# Altium PCB Leningrad_modify.PcbDoc (part 1 of 4)
Units mil, origin at the board's own origin, x right, y up, seen from the top; angles counter-clockwise.
Board outline 10000 x 7310 mil, 2 copper layers (Top Layer, Bottom Layer); 250 components, 267 nets, 1381 pads, 472 vias.
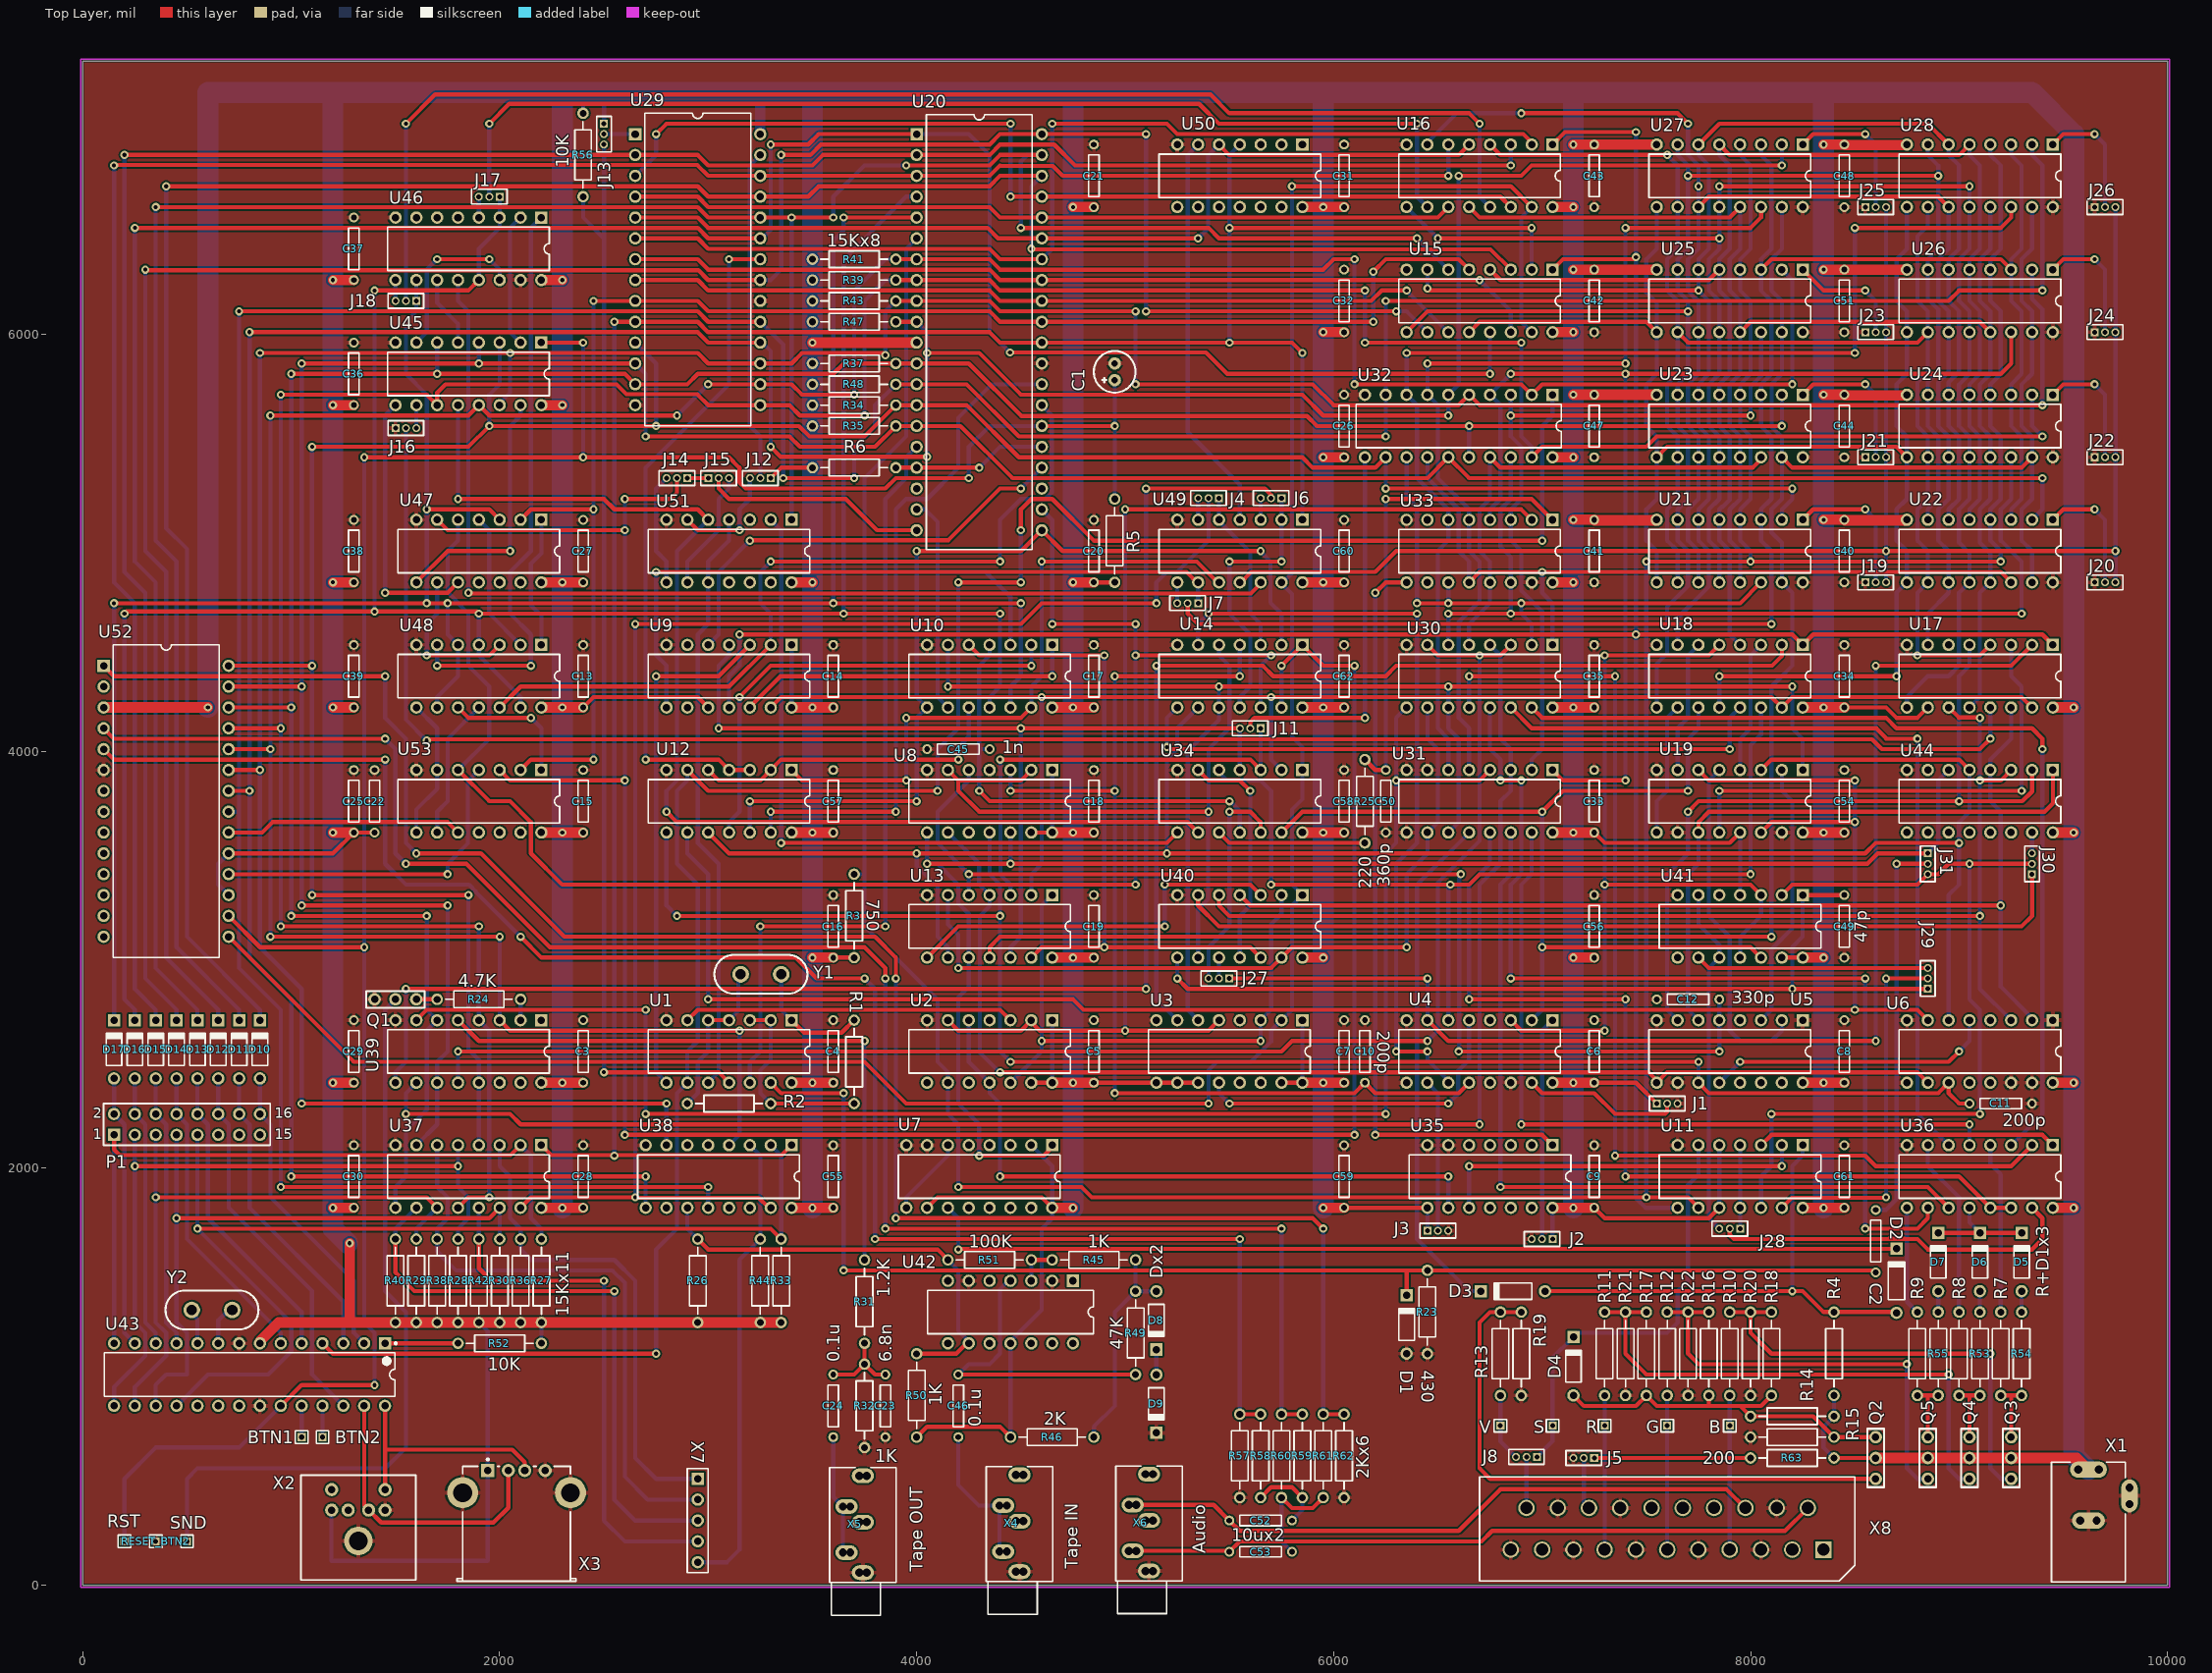
[diagram p0: Top Layer view]
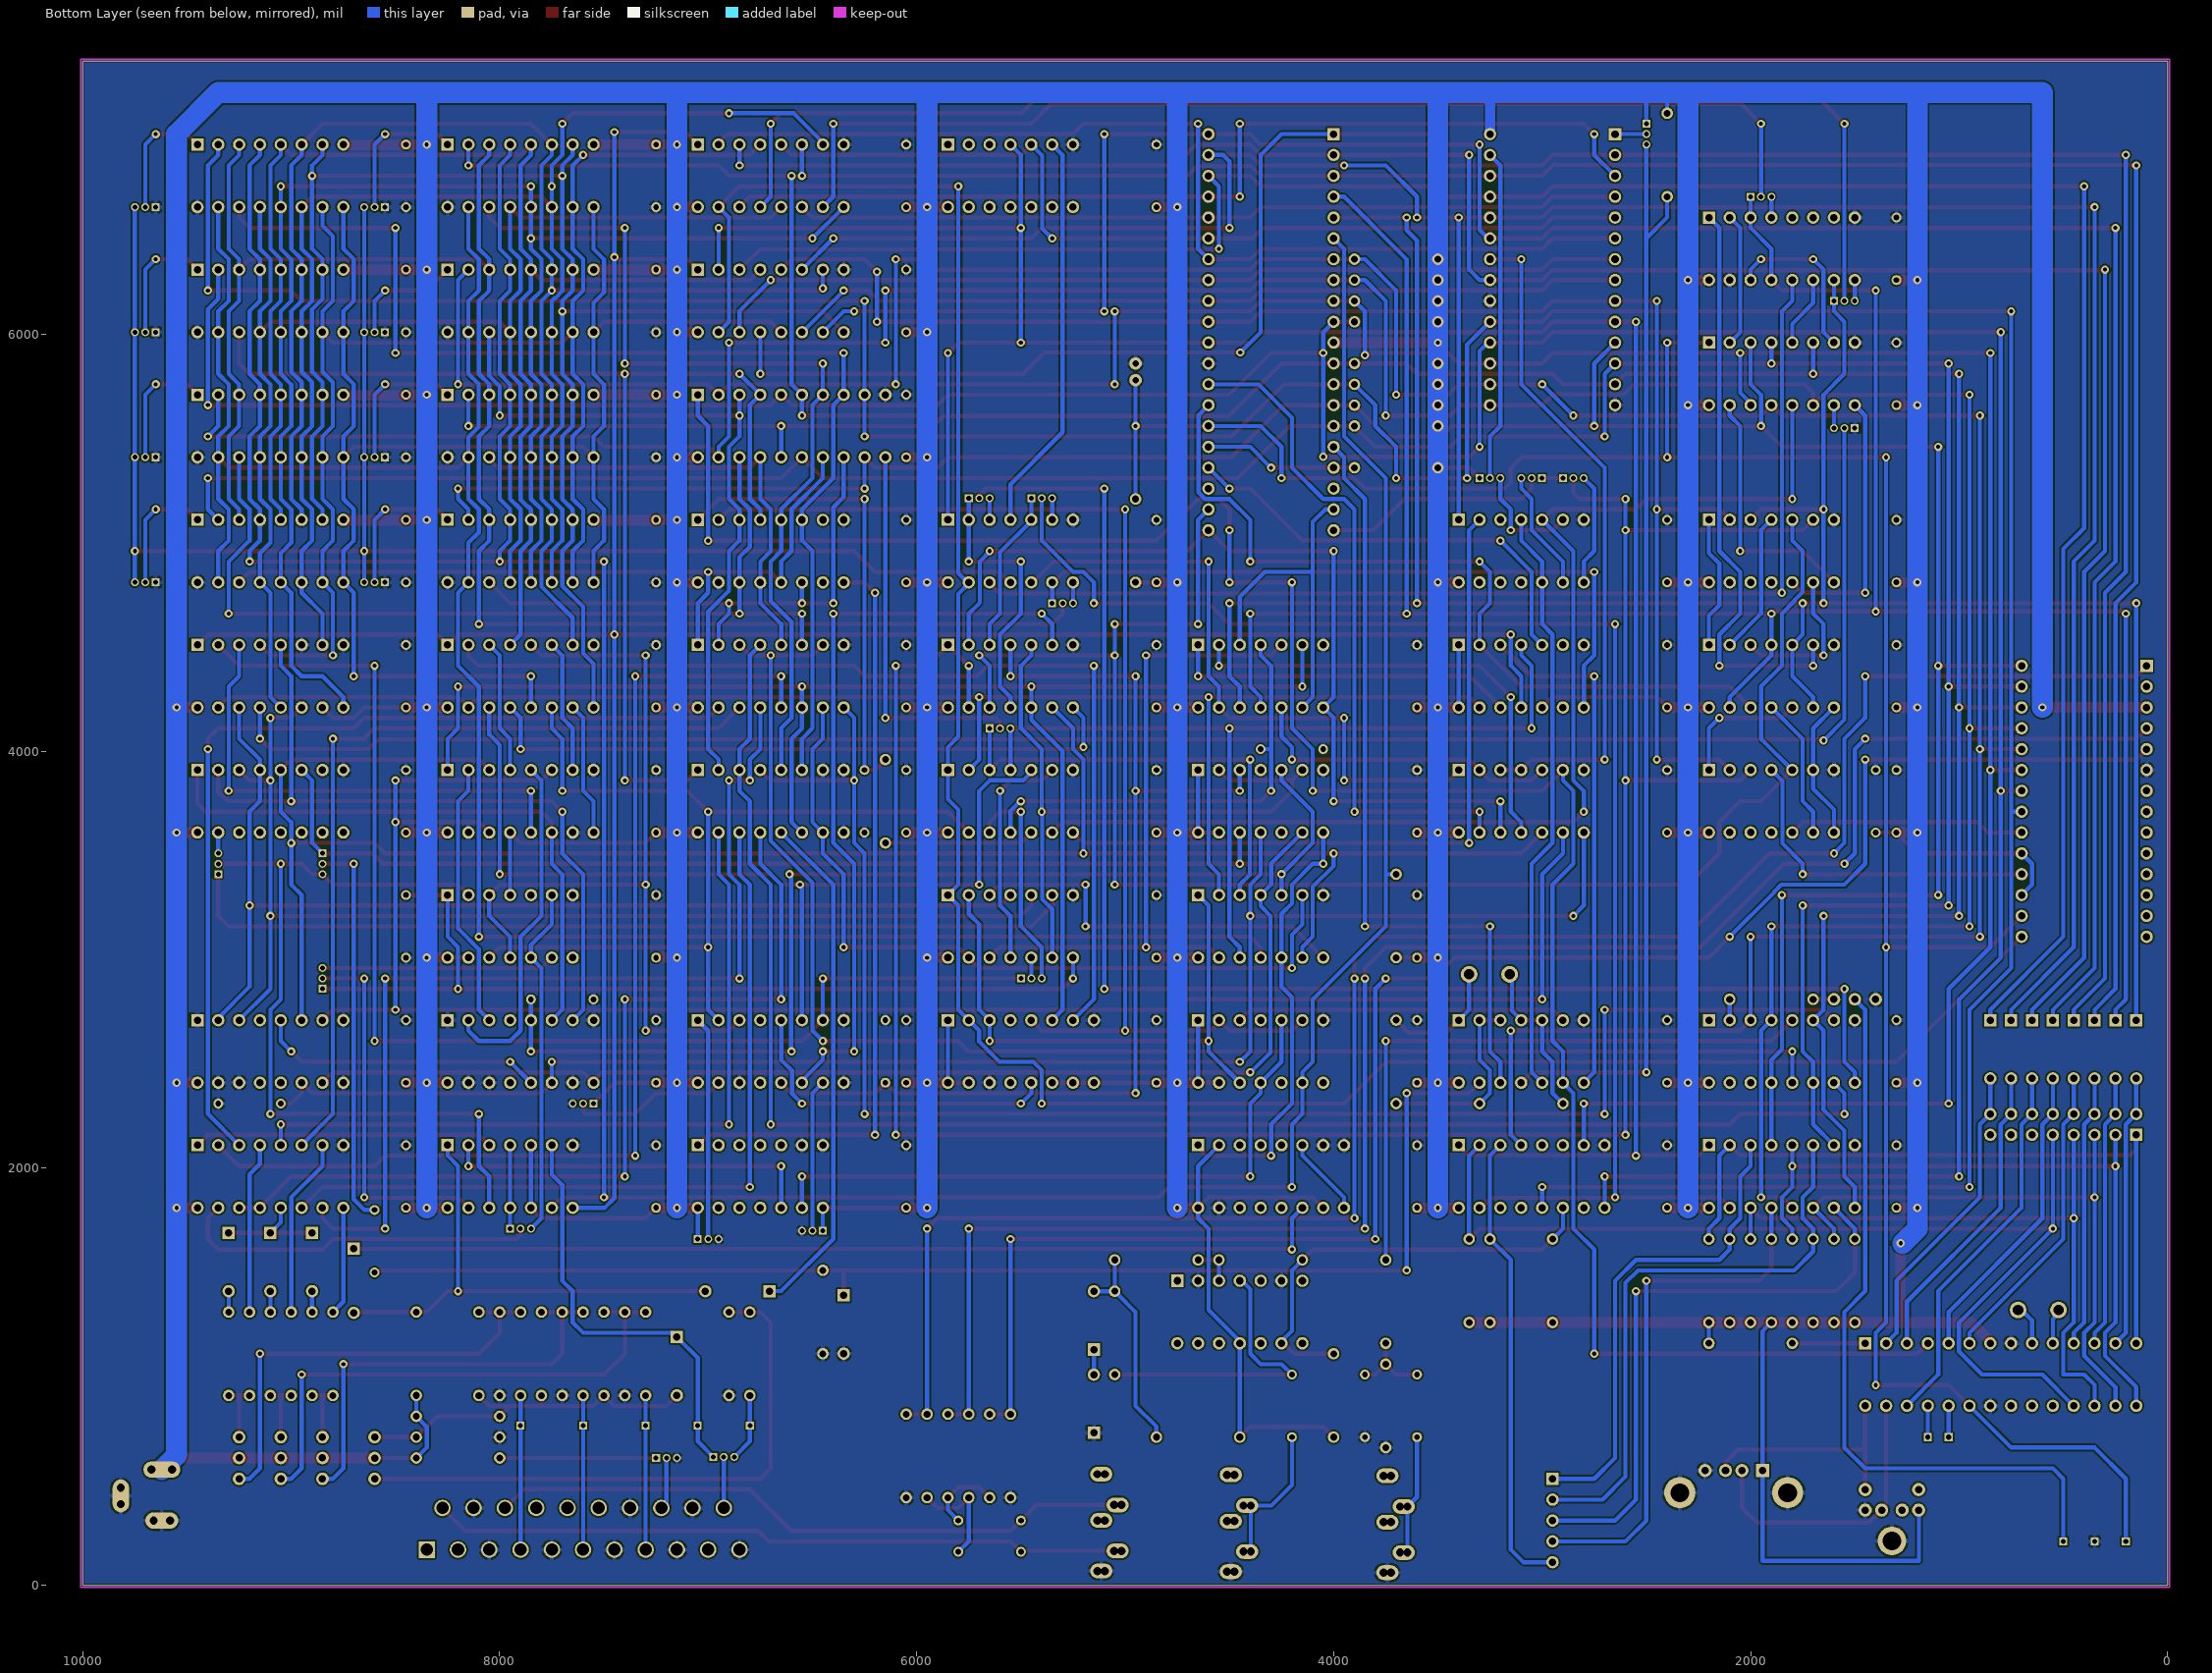
[diagram p1: Bottom Layer view, seen from below]

## Layer stack, top to bottom
Top Solder: solder mask 0.4, Solder Resist, Dk 3.5
Top Layer: signal copper 1.4
Dielectric 1: dielectric 12.6, FR-4, Dk 4.8
Bottom Layer: signal copper 1.4
Bottom Solder: solder mask 0.4, Solder Resist, Dk 3.5

## Board outline
0,0 10000,0 10000,7310 0,7310

## Design rules (kind name [scope] priority, off if disabled: settings)
BoardOutlineClearance [All] p1: gap=7.87 ignorepadtopadclearanceinfootprint=FALSE except(15.75: Arc-SplitBarrior Arc-SplitContinuation Track-SplitBarrior Track-SplitContinuation SMDPad-SplitBarrior SMDPad-SplitContinuation THPad-SplitBarrior THPad-SplitContinuation Via-SplitBarrior Via-SplitContinuation Fill-SplitBarrior Fill-SplitContinuation Poly-SplitBarrior Poly-SplitContinuation Region-SplitBarrior Region-SplitContinuation Text-SplitBarrior Text-SplitContinuation)
Clearance "Clearance Bottom Layer" [OnLayer('Bottom Layer')] p1: gap=8 ignorepadtopadclearanceinfootprint=TRUE except(10: Arc-Text Track-Text SMDPad-Text THPad-Text Via-Text Fill-Text Poly-Text Region-Text Text-Text)
Clearance "Clearance Top Layer" [OnLayer('Top Layer')] p2: gap=8 ignorepadtopadclearanceinfootprint=TRUE except(10: Arc-Text Track-Text SMDPad-Text THPad-Text Via-Text Fill-Text Poly-Text Region-Text Text-Text)
Clearance [All] p3: gap=7.87 ignorepadtopadclearanceinfootprint=FALSE except(3.5: Arc-Arc Arc-Track Arc-SMDPad Track-Track Track-SMDPad SMDPad-SMDPad; 5: Arc-Via Track-Via SMDPad-Via THPad-Via Via-Via; 10: Arc-Text Track-Text SMDPad-Text THPad-Text Via-Text Fill-Text Poly-Text Region-Text Text-Text)
HoleSize [All] p1: absolutevalues=TRUE maxlimit=248.03 minlimit=7.87 maxpercent=80.000 minpercent=20.000
MinimumAnnularRing [All] p1: minimumring=3
MinimumSolderMaskSliver [All] p1: minsoldermaskwidth=3.94
PolygonConnect PolygonConnect_1 [All] p1: thpad.connectstyle=Relief thpad.reliefconductorwidth=20 thpad.reliefentries=4 thpad.polygonreliefangle="90 Angle" thpad.airgapwidth=10 smdpad.connectstyle=Relief smdpad.reliefconductorwidth=20 smdpad.reliefentries=4 smdpad.polygonreliefangle="90 Angle" smdpad.airgapwidth=10 via.connectstyle=Direct via.reliefconductorwidth=20 via.reliefentries=4 via.polygonreliefangle="90 Angle" via.airgapwidth=10
RoomDefinition Mem [InComponentClass('Mem')] p1: confinementstyle=ConfineIn formatcopy=TRUE lockcomponents=FALSE outline 7205,4715 9805,4715 9805,6955 7205,6955
RoomDefinition Key [InComponentClass('Key')] p2: confinementstyle=ConfineIn formatcopy=TRUE lockcomponents=FALSE outline 89.21,816.47 89.21,1203.53 381.99,1203.53 381.99,1428 858.01,1428 858.01,1213.94 2241.56,1213.94 2241.56,1106.06 1521.02,1106.06 1521.02,816.47
RoutingCorners [All] p1: cornerstyle=Round minsetback=100 maxsetback=100
RoutingVias [All] p1: holewidth=19.68 width=39.37 viastyle="Through Hole" minholewidth=7.87 minwidth=17.72 maxholewidth=39.37 maxwidth=78.74
SilkToSilkClearance [All] p1: silktosilkclearance=3.94
SilkToSolderMaskClearance [IsPad] p1: minsilkscreentomaskgap=3.94 clearancetoexposedcopper=TRUE
SolderMaskExpansion [All] p1: expansion=4
Width [All] p1: maxlimit=100 minlimit=3.5 preferedwidth=15
25 further rules are at their usual default settings.

## Classes and differential pairs
component class Audio: C22 C25 C52 C53 R57 R58 R59 R60 R61 R62 U52 U53
component class CG: C3 C4 C5 C6 C7 C8 C9 C10 C11 C12 J1 J2 J3 R1 R2 R3 U1 U2 U3 U4 U5 U6 Y1
component class Con: B BTN1 BTN2 D10 D11 D12 D13 D14 D15 D16 D17 G J5 J8 P1 R R63 RESET_BTN2 RST S SND V X1 X2 X3 X4 X5 X6 X7 X8
component class CR: C1 C26 C27 J11 J12 J13 J14 J15 R5 R6 R34 R35 R37 R39 R41 R43 R47 R48 R56 U20 U29 U32 U51
component class CS: C13 C14 C15 C16 C17 C18 C19 C20 C21 C45 J4 J6 J7 U9 U10 U12 U13 U14 U34 U40 U49 U50
component class In: C23 C24 C28 C29 C30 C46 D8 D9 Q1 R24 R26 R27 R28 R29 R30 R31 R32 R33 R36 R38 R40 R42 R44 R45 R46 R49 R50 R51 U37 U38 U39 U42
component class Key: R52 U43 Y2
component class MC: C31 C32 C33 C34 C35 C36 C37 C38 C39 J16 J17 J18 U15 U16 U17 U18 U19 U45 U46 U47 U48
component class Mem: C40 C41 C42 C43 C44 C47 C48 C51 J19 J20 J21 J22 J23 J24 J25 J26 U21 U22 U23 U24 U25 U26 U27 U28
component class VC: C2 C49 C54 C55 C56 C57 D1 J27 J28 J29 J30 J31 R23 U7 U8 U41 U44
component class VS: C50 C58 C59 C60 C61 C62 D2 D3 D4 D5 D6 D7 Q2 Q3 Q4 Q5 R4 R7 R8 R9 R10 R11 R12 R13 R14 R15 R16 R17 R18 R19 R20 R21 R22 R25 R53 R54 R55 U11 U30 U31 U33 U35 U36

## Components (designator, comment, footprint, x,y, rotation, side; value= is the part's Value field where it differs from the comment)
B "" PIN1 7900,765 r90 top
BTN1 "Socket" PIN1 1050,710 r90 top
BTN2 "Socket" PIN1 1150,710 r90 top
C1 "Cap Pol1" JRB-5D 4950,5820 r90 top value=10uF
C2 "Cap" RAD-0.3 8600,1650 r270 top value=33nF
C3 "Cap" RAD-0.3 2400,2560 r270 top value=0.1uF
C4 "Cap" RAD-0.3 3600,2560 r270 top value=0.1uF
C5 "Cap" RAD-0.3 4850,2560 r270 top value=0.1uF
C6 "Cap" RAD-0.3 7250,2560 r270 top value=0.1uF
C7 "Cap" RAD-0.3 6050,2560 r270 top value=0.1uF
C8 "Cap" RAD-0.3 8450,2560 r270 top value=0.1uF
C9 "Cap" RAD-0.3 7250,1960 r270 top value=0.1uF
C10 "200p" RAD-0.3 6150,2560 r270 top value=200pF
C11 "200p" RAD-0.3 9200,2310 r0 top value=200pF
C12 "330p" RAD-0.3 7700,2810 r0 top value=330pF
C13 "Cap" RAD-0.3 2400,4360 r270 top value=0.1uF
C14 "Cap" RAD-0.3 3600,4360 r270 top value=0.1uF
C15 "Cap" RAD-0.3 2400,3760 r270 top value=0.1uF
C16 "Cap" RAD-0.3 3600,3160 r270 top value=0.1uF
C17 "Cap" RAD-0.3 4850,4360 r270 top value=0.1uF
C18 "Cap" RAD-0.3 4850,3760 r270 top value=0.1uF
C19 "Cap" RAD-0.3 4850,3160 r270 top value=0.1uF
C20 "Cap" RAD-0.3 4850,4960 r270 top value=0.1uF
C21 "Cap" RAD-0.3 4850,6760 r270 top value=0.1uF
C22 "Cap" RAD-0.3 1400,3760 r90 top value=0.1uF
C23 "6.8n" RAD-0.3 3850,860 r90 top value=6.8nF
C24 "0.1u" RAD-0.3 3600,860 r90 top value=0.1uF
C25 "Cap" RAD-0.3 1300,3760 r90 top value=0.1uF
C26 "Cap" RAD-0.3 6050,5560 r90 top value=0.1uF
C27 "Cap" RAD-0.3 2400,4960 r90 top value=0.1uF
C28 "Cap" RAD-0.3 2400,1960 r270 top value=0.1uF
C29 "Cap" RAD-0.3 1300,2560 r270 top value=0.1uF
C30 "Cap" RAD-0.3 1300,1960 r270 top value=0.1uF
C31 "Cap" RAD-0.3 6050,6760 r270 top value=0.1uF
C32 "Cap" RAD-0.3 6050,6160 r270 top value=0.1uF
C33 "Cap" RAD-0.3 7250,3760 r270 top value=0.1uF
C34 "Cap" RAD-0.3 8450,4360 r270 top value=0.1uF
C35 "Cap" RAD-0.3 7250,4360 r270 top value=0.1uF
C36 "Cap" RAD-0.3 1300,5810 r270 top value=0.1uF
C37 "Cap" RAD-0.3 1300,6410 r270 top value=0.1uF
C38 "Cap" RAD-0.3 1300,4960 r270 top value=0.1uF
C39 "Cap" RAD-0.3 1300,4360 r270 top value=0.1uF
C40 "Cap" RAD-0.3 8450,4960 r90 top value=0.1uF
C41 "Cap" RAD-0.3 7250,4960 r90 top value=0.1uF
C42 "Cap" RAD-0.3 7250,6160 r90 top value=0.1uF
C43 "Cap" RAD-0.3 7250,6760 r90 top value=0.1uF
C44 "Cap" RAD-0.3 8450,5560 r90 top value=0.1uF
C45 "1n" RAD-0.3 4200,4010 r0 top value=1000pF
C46 "0.1u" RAD-0.3 4200,860 r90 top value=0.1uF
C47 "Cap" RAD-0.3 7250,5560 r90 top value=0.1uF
C48 "Cap" RAD-0.3 8450,6760 r90 top value=0.1uF
C49 "47p" RAD-0.3 8450,3160 r90 top value=47pF
C50 "360p" RAD-0.3 6250,3760 r270 top value=360pF
C51 "Cap" RAD-0.3 8450,6160 r90 top value=0.1uF
C52 "Cap" RAD-0.3 5650,310 r180 top value=10uF
C53 "10ux2" RAD-0.3 5650,160 r180 top value=10uF
C54 "Cap" RAD-0.3 8450,3760 r270 top value=0.1uF
C55 "Cap" RAD-0.3 3600,1960 r270 top value=0.1uF
C56 "Cap" RAD-0.3 7250,3160 r270 top value=0.1uF
C57 "Cap" RAD-0.3 3600,3760 r270 top value=0.1uF
C58 "Cap" RAD-0.3 6050,3760 r270 top value=0.1uF
C59 "Cap" RAD-0.3 6050,1960 r270 top value=0.1uF
C60 "Cap" RAD-0.3 6050,4960 r270 top value=0.1uF
C61 "Cap" RAD-0.3 8450,1960 r270 top value=0.1uF
C62 "Cap" RAD-0.3 6050,4360 r270 top value=0.1uF
D1 "Diode 1N4148" DO-35 6350,1250.24 r90 top
D2 "" DO-35A 8700,1460 r90 top
D3 "" DO-35A 6860,1410 r180 top
D4 "Diode 1N4148" DO-35 7150,1050 r90 top
D5 "Diode 1N4148" DO-35 9300,1550 r90 top
D6 "Diode 1N4148" DO-35 9100,1550 r90 top
D7 "R+D1x3" DO-35 8900,1550 r90 top
D8 "Diode 1N4148" DO-35 5150,1270 r270 top
D9 "Dx2" DO-35 5150,870 r270 top
D10 "Diode 1N4148" DO-35 850,2570 r90 top
D11 "Diode 1N4148" DO-35 750,2570 r90 top
D12 "Diode 1N4148" DO-35 650,2570 r90 top
D13 "Diode 1N4148" DO-35 550,2570 r90 top
D14 "Diode 1N4148" DO-35 450,2570 r90 top
D15 "Diode 1N4148" DO-35 350,2570 r90 top
D16 "Diode 1N4148" DO-35 250,2570 r90 top
D17 "Diode 1N4148" DO-35 150,2570 r90 top
G "" PIN1 7600,765 r90 top
J1 "Jump3" MHDR1X3 7550,2310 r0 top
J2 "Jump3" MHDR1X3 7050,1660 r180 top
J3 "Jump3" MHDR1X3 6450,1700 r0 top
J4 "Jump3" MHDR1X3 5450,5214.09 r180 top
J5 "Jump3" MHDR1X3 7250,610 r180 top
J6 "Jump3" MHDR1X3 5750,5214.09 r180 top
J7 "Jump3" MHDR1X3 5350,4710 r180 top
J8 "Jump3" MHDR1X3 6975,615 r180 top
J11 "Jump3" MHDR1X3 5650,4110 r180 top
J12 "Jump3" MHDR1X3 3300,5310 r180 top
J13 "Jump3" MHDR1X3 2500,7010 r270 top
J14 "Jump3" MHDR1X3 2900,5310 r180 top
J15 "Jump3" MHDR1X3 3000,5310 r0 top
J16 "Jump3" MHDR1X3 1500,5550 r0 top
J17 "Jump3" MHDR1X3 2000,6660 r180 top
J18 "Jump3" MHDR1X3 1600,6160 r180 top
J19 "Jump3" MHDR1X3 8550,4810 r0 top
J20 "Jump3" MHDR1X3 9650,4810 r0 top
J21 "Jump3" MHDR1X3 8550,5410 r0 top
J22 "Jump3" MHDR1X3 9650,5410 r0 top
J23 "Jump3" MHDR1X3 8550,6010 r0 top
J24 "Jump3" MHDR1X3 9650,6010 r0 top
J25 "Jump3" MHDR1X3 8550,6610 r0 top
J26 "Jump3" MHDR1X3 9650,6610 r0 top
J27 "Jump3" MHDR1X3 5500,2910 r180 top
J28 "Jump3" MHDR1X3 7950,1710 r180 top
J29 "Jump3" MHDR1X3 8850,2860 r90 top
J30 "Jump3" MHDR1X3 9350,3410 r90 top
J31 "Jump3" MHDR1X3 8850,3510 r270 top
P1 "Header 8X2" HDR2X8 150,2160 r0 top
Q1 "KT315" D35 1500,2810 r0 top
Q2 "KT315" D35 8600,609.76 r90 top
Q3 "KT315" D35 9250,610 r90 top
Q4 "KT315" D35 9050,610 r90 top
Q5 "KT315" D35 8850,610 r90 top
R "" PIN1 7300,765 r90 top
R1 "" AXIAL-0.4 3700,2510 r270 top value=470
R2 "" AXIAL-0.4 3100,2310 r180 top value=470
R3 "750" AXIAL-0.4 3700,3210 r270 top
R4 "" AXIAL-0.4 8400,1110 r90 top value=10K
R5 "" AXIAL-0.4 4950,5010 r90 top value=10K
R6 "" AXIAL-0.4 3700,5360 r180 top value=10K
R7 "" AXIAL-0.4 9200,1109.76 r270 top value=680
R8 "" AXIAL-0.4 9000,1109.76 r270 top value=680
R9 "" AXIAL-0.4 8800,1109.76 r270 top value=680
R10 "" AXIAL-0.4 7900,1109.76 r270 top value=75
R11 "" AXIAL-0.4 7300,1109.76 r270 top value=75
R12 "" AXIAL-0.4 7600,1109.76 r270 top value=75
R13 "" AXIAL-0.4 6800,1109.76 r270 top value=75
R14 "" AXIAL-0.4 8200,809.76 r0 top value=750
R15 "" AXIAL-0.4 8200,709.76 r0 top value=1K
R16 "" AXIAL-0.4 7800,1109.76 r270 top value=470
R17 "" AXIAL-0.4 7500,1109.76 r270 top value=1K
R18 "" AXIAL-0.4 8100,1109.76 r270 top value=2K
R19 "" AXIAL-0.4 6900,1109.76 r90 top value=200
R20 "" AXIAL-0.4 8000,1109.76 r90 top value=200
R21 "" AXIAL-0.4 7400,1109.76 r90 top value=200
R22 "" AXIAL-0.4 7700,1109.76 r90 top value=200
R23 "430" AXIAL-0.4 6450,1310 r90 top
R24 "4.7K" AXIAL-0.4 1900,2810 r180 top
R25 "220" AXIAL-0.4 6150,3760 r270 top
R26 "15Kx11" AXIAL-0.4 2950,1460 r270 top value=15K
R27 "Res2" AXIAL-0.4 2200,1460 r270 top value=15K
R28 "Res2" AXIAL-0.4 1800,1460 r270 top value=15K
R29 "Res2" AXIAL-0.4 1600,1460 r270 top value=15K
R30 "Res2" AXIAL-0.4 2000,1460 r270 top value=15K
R31 "1.2K" AXIAL-0.4 3750,1360 r270 top
R32 "1K" AXIAL-0.4 3750,860 r90 top
R33 "Res2" AXIAL-0.4 3350,1460 r270 top value=15K
R34 "" AXIAL-0.4 3700,5660 r180 top value=15K
R35 "15Kx8" AXIAL-0.4 3700,5560 r180 top value=15K
R36 "Res2" AXIAL-0.4 2100,1460 r270 top value=15K
R37 "" AXIAL-0.4 3700,5860 r180 top value=15K
R38 "Res2" AXIAL-0.4 1700,1460 r270 top value=15K
R39 "" AXIAL-0.4 3700,6260 r180 top value=15K
R40 "Res2" AXIAL-0.4 1500,1460 r270 top value=15K
R41 "" AXIAL-0.4 3700,6360 r180 top value=15K
R42 "Res2" AXIAL-0.4 1900,1460 r270 top value=15K
R43 "" AXIAL-0.4 3700,6160 r180 top value=15K
R44 "Res2" AXIAL-0.4 3250,1460 r270 top value=15K
R45 "1K" AXIAL-0.4 4850,1560 r0 top
R46 "2K" AXIAL-0.4 4650,710 r180 top
R47 "" AXIAL-0.4 3700,6060 r180 top value=15K
R48 "" AXIAL-0.4 3700,5760 r180 top value=15K
R49 "47K" AXIAL-0.4 5050,1210 r90 top
R50 "1K" AXIAL-0.4 4000,910 r270 top
R51 "100K" AXIAL-0.4 4350,1560 r0 top
R52 "10K" AXIAL-0.4 2000,1160 r0 top
R53 "Res2" AXIAL-0.4 9100,1109.76 r270 top value=680
R54 "Res2" AXIAL-0.4 9300,1109.76 r270 top value=680
R55 "Res2" AXIAL-0.4 8900,1109.76 r270 top value=680
R56 "10K" AXIAL-0.4 2400,6860 r270 top
R57 "Res2" AXIAL-0.4 5550,620 r270 top value=2K
R58 "Res2" AXIAL-0.4 5650,620 r270 top value=2K
R59 "Res2" AXIAL-0.4 5850,620 r270 top value=2K
R60 "Res2" AXIAL-0.4 5750,620 r90 top value=2K
R61 "Res2" AXIAL-0.4 5950,620 r270 top value=2K
R62 "2Kx6" AXIAL-0.4 6050,620 r90 top value=2K
R63 "200" AXIAL-0.4 8200,610 r180 top
RESET_BTN2 "" PIN1 350,210 r90 top
RST "" PIN1 200,210 r90 top
S "" PIN1 7050,765 r90 top (schematic designator SYNC)
SND "" PIN1 500,210 r90 top
U1 "" N014 3100,2560 r180 top
U2 "" N014 4350,2560 r180 top
U3 "" N016 5500,2560 r180 top
U4 "" N016 6700,2560 r180 top
U5 "" N016 7900,2560 r180 top
U6 "" N016 9100,2560 r180 top
U7 "" 648-08 4300,1960 r180 top
U8 "" N014 4350,3760 r180 top
U9 "" N014 3100,4360 r180 top
U10 "" N014 4350,4360 r180 top
U11 "" N014 7950,1960 r180 top
U12 "" N014 3100,3760 r180 top
U13 "" N014 4350,3160 r180 top
U14 "" N014 5550,4360 r180 top
U15 "" N016 6700,6160 r180 top
U16 "" N016 6700,6760 r180 top
U17 "" N016 9100,4360 r180 top
U18 "" N016 7900,4360 r180 top
U19 "" N016 7900,3760 r180 top
U20 "Z84C0004PEC" PDIP40 4300,6010 r270 top
U21 "MN41256A-08" DIP16 8248.81,5110 r270 top
U22 "MN41256A-08" DIP16 9448.81,5110 r270 top
U23 "MN41256A-08" DIP16 8248.81,5710 r270 top
U24 "MN41256A-08" DIP16 9448.81,5710 r270 top
U25 "MN41256A-08" DIP16 8248.81,6310 r270 top
U26 "MN41256A-08" DIP16 9448.81,6310 r270 top
U27 "MN41256A-08" DIP16 8248.81,6910 r270 top
U28 "MN41256A-08" DIP16 9448.81,6910 r270 top
U29 "M27C512-10B1" PDIP28 2950,6310 r270 top
U30 "" N016D 6700,4360 r180 top
U31 "" N016D 6700,3760 r180 top
U32 "" N020 6600,5560 r180 top
U33 "" N016 6700,4959.76 r180 top
U34 "" N014 5550,3760 r180 top
U35 "" N014 6750,1960 r180 top
U36 "" N016 9100,1960 r180 top
U37 "" N016 1850,1960 r180 top
U38 "" N016 3050,1960 r180 top
U39 "" N016 1850,2560 r180 top
U40 "" N014 5550,3160 r180 top
U41 "SN74HC74N" N014 7950,3160 r180 top
U42 "LM111J" J014 4450,1310 r180 top
U43 "ATmega168A-PU" 28P3 800,1010 r270 top
U44 "" N016 9100,3760 r180 top
U45 "SN74HC174N" N016 1850,5810 r180 top
U46 "SN74HC257N" N016 1850,6410 r180 top
U47 "SN74HC02N" N014 1900,4960 r180 top
U48 "SN74HC00N" N014 1900,4360 r180 top
U49 "SN74HC32N" N014 5550,4960 r180 top
U50 "SN74HC08N" N014 5550,6760 r180 top
U51 "SN74HC32N" N014 3100,4960 r180 top
U52 "AY-3-8912" FDIP28W 400,3760 r270 top
U53 "SN74HC02N" N014 1900,3760 r180 top
V "" PIN1 6800,765 r90 top (schematic designator VIDEO)
X1 "PWR2.5" KLD-0202 9620.63,14.72 r90 top
X2 "PS2-6PIN" PS2-6PIN 1322.05,25.35 r180 top
X3 "787761-1" 787761 2080.63,18.9 r270 top
X4 "Tape IN" ST-3150-5N 4460,-140 r180 top
X5 "Tape OUT" ST-3150-5N 3708.82,-144.72 r180 top
X6 "Audio" ST-3150-5N 5081.18,-136.85 r180 top
X7 "Header 5" HDR1X5 2950,510 r270 top
X8 "SCART" SCART 8350,170 r180 top
Y1 "XTAL" HC25U 3253,2930 r180 top
Y2 "24 MHz" HC25U 620,1320 r180 top

## Footprints (in the part's own frame and the unit in brackets; to place one, negate y for a bottom-side part, rotate by r counter-clockwise, add the part's x,y. Pads: shape width x height; smd on the part's side, far side on the other; paste and mask are expansions set on the pad)
28P3 [mm] "DIP, 28-Leads, Row Spacing 7.62mm, Pitch 2.54mm, Body 34.67x7.3mm"
  rect 1.5x1.5 hole 0.9: 1(-3.81,16.51)
  round 1.5 hole 0.9: 2(-3.81,13.97) 3(-3.81,11.43) 4(-3.81,8.89) 5(-3.81,6.35) 6(-3.81,3.81) 7(-3.81,1.27) 8(-3.81,-1.27) 9(-3.81,-3.81) 10(-3.81,-6.35) 11(-3.81,-8.89) 12(-3.81,-11.43) 13(-3.81,-13.97) 14(-3.81,-16.51) 15(3.81,-16.51) 16(3.81,-13.97) 17(3.81,-11.43) 18(3.81,-8.89) 19(3.81,-6.35) 20(3.81,-3.81) 21(3.81,-1.27) 22(3.81,1.27) 23(3.81,3.81) 24(3.81,6.35) 25(3.81,8.89) 26(3.81,11.43) 27(3.81,13.97) 28(3.81,16.51)
  silkscreen extent -3.93,-17.7 2.65,17.94, body extent -3.6,-17.65 3.6,17.65, height 4.58
648-08 [mm] "DIP; 16 Leads; Row Spacing 7.62 mm; Pitch 2.54 mm"
  rect 1.5x1.5 hole 0.9: 1(-8.89,-3.81)
  round 1.5 hole 0.9: 2(-6.35,-3.81) 3(-3.81,-3.81) 4(-1.27,-3.81) 5(1.27,-3.81) 6(3.81,-3.81) 7(6.35,-3.81) 8(8.89,-3.81) 9(8.89,3.81) 10(6.35,3.81) 11(3.81,3.81) 12(1.27,3.81) 13(-1.27,3.81) 14(-3.81,3.81) 15(-6.35,3.81) 16(-8.89,3.81)
  silkscreen extent -9.85,-2.65 9.85,2.65
787761 [mm] "Connector; USB1.1, Type A, Thru-Hole; 4 Position; Right Angle"
  rect 1.6x1.6 hole 0.92: 1(-13.49,-3.5)
  round 1.6 hole 0.92: 2(-13.49,-1) 3(-13.49,1) 4(-13.49,3.5)
  round 3.8 hole 2.3: 5(-10.78,6.57) 6(-10.78,-6.57)
  silkscreen extent -14.96,-7.25 0,7.25
AXIAL-0.4 [mm] "Axial Device, Thru-Hole; 2 Leads; 0.4 in Pin Spacing"
  round 1.4 hole 0.85: 1(-5.08,0) 2(5.08,0)
  silkscreen extent -4.06,-1.02 4.06,1.02
D35 [mil]
  round 60 hole 35.43: 1(-100,0) 2(0,0) 3(100,0)
  silkscreen extent -140,-40 140,40
DIP16 [mm]
  rect 1.5x1.5 hole 0.9: 1(0,0.03)
  round 1.5 hole 0.9: 2(0,-2.51) 3(0,-5.05) 4(0,-7.59) 5(0,-10.13) 6(0,-12.67) 7(0,-15.21) 8(0,-17.75) 9(7.62,-17.75) 10(7.62,-15.21) 11(7.62,-12.67) 12(7.62,-10.13) 13(7.62,-7.59) 14(7.62,-5.05) 15(7.62,-2.51) 16(7.62,0.03)
  silkscreen extent 1.16,-18.71 6.46,0.99
DO-35 [mm] "Diode, Axial; Body 3.8 x 1.9 mm (LxDia. max), Lead Dia. 0.53 mm (max)"
  round 1.5 hole 0.9: 1(-3.55,0)
  rect 1.5x1.5 hole 0.9: 2(3.55,0)
  silkscreen extent -1.95,-0.95 2.05,0.95
DO-35A [mm] "Diode, Axial; Body 4.6 x 1.9 mm (LxDia. max), Lead Dia. 0.53 mm (max)"
  round 1.5 hole 0.9: 1(-3.9,0)
  rect 1.5x1.5 hole 0.9: 2(3.9,0)
  silkscreen extent -2.3,-1 2.4,1
FDIP28W [mm] "Ceramic Frit-seal DIP, Window; 28 Leads; Row Spacing 15.24 mm; Pitch 2.54 mm"
  rect 1.5x1.5 hole 0.9: 1(-16.51,-7.62)
  round 1.5 hole 0.9: 2(-13.97,-7.62) 3(-11.43,-7.62) 4(-8.89,-7.62) 5(-6.35,-7.62) 6(-3.81,-7.62) 7(-1.27,-7.62) 8(1.27,-7.62) 9(3.81,-7.62) 10(6.35,-7.62) 11(8.89,-7.62) 12(11.43,-7.62) 13(13.97,-7.62) 14(16.51,-7.62) 15(16.51,7.62) 16(13.97,7.62) 17(11.43,7.62) 18(8.89,7.62) 19(6.35,7.62) 20(3.81,7.62) 21(1.27,7.62) 22(-1.27,7.62) 23(-3.81,7.62) 24(-6.35,7.62) 25(-8.89,7.62) 26(-11.43,7.62) 27(-13.97,7.62) 28(-16.51,7.62)
  silkscreen extent -19.05,-6.45 19.05,6.45
HC25U [mil]
  round 80 hole 50: 1(-97,0) 2(97,0)
  silkscreen extent -223,-93 223,93
HDR1X5 [mm] "Connector; Header; 5 Position"
  rect 1.5x1.5 hole 0.9: 1(0,0)
  round 1.5 hole 0.9: 2(2.54,0) 3(5.08,0) 4(7.62,0) 5(10.16,0)
  silkscreen extent -1.27,-1.27 11.43,1.27
HDR2X8 [mm] "Connector; Header; 8x2 Position"
  rect 1.5x1.5 hole 0.9: 1(0,0)
  round 1.5 hole 0.9: 2(0,2.54) 3(2.54,0) 4(2.54,2.54) 5(5.08,0) 6(5.08,2.54) 7(7.62,0) 8(7.62,2.54) 9(10.16,0) 10(10.16,2.54) 11(12.7,0) 12(12.7,2.54) 13(15.24,0) 14(15.24,2.54) 15(17.78,0) 16(17.78,2.54)
  silkscreen extent -1.27,-1.27 19.05,3.81
J014 [mm] "DIP; 14 Leads; Row Spacing 7.62 mm; Pitch 2.54 mm"
  rect 1.5x1.5 hole 0.9: 1(-7.62,-3.81)
  round 1.5 hole 0.9: 2(-5.08,-3.81) 3(-2.54,-3.81) 4(0,-3.81) 5(2.54,-3.81) 6(5.08,-3.81) 7(7.62,-3.81) 8(7.62,3.81) 9(5.08,3.81) 10(2.54,3.81) 11(0,3.81) 12(-2.54,3.81) 13(-5.08,3.81) 14(-7.62,3.81)
  silkscreen extent -10.1,-2.65 10.1,2.65, body extent -9.97,-3.93 9.97,3.93, height 5.08
JRB-5D [mil]
  round 60 hole 30: 1(-40,0) 2(40,0)
  silkscreen extent -100,-100 100,100
KLD-0202 [mm] "DC Power Jack, 2.5mm, KLD Series, PCB Mount"
  oval 2x4.5 all layers, no hole: 1(13.7,0)
  round 1.5 hole 1: 1A(13.7,-1.25) 1B(13.7,1.25) 2A(7.5,-1) 2B(7.5,1) 3A(9.5,-5) 3B(11.5,-5)
  oval 2x4 all layers, no hole: 2(7.5,0)
  oval 4x2 all layers, no hole: 3(10.5,-5)
  silkscreen extent 0,-4.5 14.6,4.5
MHDR1X3 [mil] "Connector; Header; 3 Position"
  rect 38x38 hole 23.62: 1(0,0)
  round 38 hole 23.62: 2(50,0) 3(100,0)
  silkscreen extent -35,-35 135,35
N014 [mm] "DIP; 14 Leads; Row Spacing 7.62 mm; Pitch 2.54 mm"
  rect 1.5x1.5 hole 0.9: 1(-7.62,-3.81)
  round 1.5 hole 0.9: 2(-5.08,-3.81) 3(-2.54,-3.81) 4(0,-3.81) 5(2.54,-3.81) 6(5.08,-3.81) 7(7.62,-3.81) 8(7.62,3.81) 9(5.08,3.81) 10(2.54,3.81) 11(0,3.81) 12(-2.54,3.81) 13(-5.08,3.81) 14(-7.62,3.81)
  silkscreen extent -9.85,-2.65 9.85,2.65
N016 [mm] "DIP; 16 Leads; Row Spacing 7.62 mm; Pitch 2.54 mm"
  rect 1.5x1.5 hole 0.9: 1(-8.89,-3.81)
  round 1.5 hole 0.9: 2(-6.35,-3.81) 3(-3.81,-3.81) 4(-1.27,-3.81) 5(1.27,-3.81) 6(3.81,-3.81) 7(6.35,-3.81) 8(8.89,-3.81) 9(8.89,3.81) 10(6.35,3.81) 11(3.81,3.81) 12(1.27,3.81) 13(-1.27,3.81) 14(-3.81,3.81) 15(-6.35,3.81) 16(-8.89,3.81)
  silkscreen extent -9.85,-2.65 9.85,2.65
N016D [mm] "DIP; 16 Leads; Row Spacing 7.62 mm; Pitch 2.54 mm"
  rect 1.5x1.5 hole 0.9: 1(-8.89,-3.81)
  round 1.5 hole 0.9: 2(-6.35,-3.81) 3(-3.81,-3.81) 4(-1.27,-3.81) 5(1.27,-3.81) 6(3.81,-3.81) 7(6.35,-3.81) 8(8.89,-3.81) 9(8.89,3.81) 10(6.35,3.81) 11(3.81,3.81) 12(1.27,3.81) 13(-1.27,3.81) 14(-3.81,3.81) 15(-6.35,3.81) 16(-8.89,3.81)
  silkscreen extent -9.85,-2.65 9.85,2.65
N020 [mm] "DIP; 20 Leads; Row Spacing 7.62 mm; Pitch 2.54 mm"
  rect 1.5x1.5 hole 0.9: 1(-11.43,-3.81)
  round 1.5 hole 0.9: 2(-8.89,-3.81) 3(-6.35,-3.81) 4(-3.81,-3.81) 5(-1.27,-3.81) 6(1.27,-3.81) 7(3.81,-3.81) 8(6.35,-3.81) 9(8.89,-3.81) 10(11.43,-3.81) 11(11.43,3.81) 12(8.89,3.81) 13(6.35,3.81) 14(3.81,3.81) 15(1.27,3.81) 16(-1.27,3.81) 17(-3.81,3.81) 18(-6.35,3.81) 19(-8.89,3.81) 20(-11.43,3.81)
  silkscreen extent -12.5,-2.65 12.5,2.65
PDIP28 [mm] "DIP; 28 Leads; Row Spacing 15.24 mm; Pitch 2.54 mm"
  rect 1.5x1.5 hole 0.9: 1(-16.51,-7.62)
  round 1.5 hole 0.9: 2(-13.97,-7.62) 3(-11.43,-7.62) 4(-8.89,-7.62) 5(-6.35,-7.62) 6(-3.81,-7.62) 7(-1.27,-7.62) 8(1.27,-7.62) 9(3.81,-7.62) 10(6.35,-7.62) 11(8.89,-7.62) 12(11.43,-7.62) 13(13.97,-7.62) 14(16.51,-7.62) 15(16.51,7.62) 16(13.97,7.62) 17(11.43,7.62) 18(8.89,7.62) 19(6.35,7.62) 20(3.81,7.62) 21(1.27,7.62) 22(-1.27,7.62) 23(-3.81,7.62) 24(-6.35,7.62) 25(-8.89,7.62) 26(-11.43,7.62) 27(-13.97,7.62) 28(-16.51,7.62)
  silkscreen extent -19.05,-6.45 19.05,6.45
PDIP40 [mm] "DIP; 40 Leads; Row Spacing 15.24 mm; Pitch 2.54 mm"
  rect 1.5x1.5 hole 0.9: 1(-24.13,-7.62)
  round 1.5 hole 0.9: 2(-21.59,-7.62) 3(-19.05,-7.62) 4(-16.51,-7.62) 5(-13.97,-7.62) 6(-11.43,-7.62) 7(-8.89,-7.62) 8(-6.35,-7.62) 9(-3.81,-7.62) 10(-1.27,-7.62) 11(1.27,-7.62) 12(3.81,-7.62) 13(6.35,-7.62) 14(8.89,-7.62) 15(11.43,-7.62) 16(13.97,-7.62) 17(16.51,-7.62) 18(19.05,-7.62) 19(21.59,-7.62) 20(24.13,-7.62) 21(24.13,7.62) 22(21.59,7.62) 23(19.05,7.62) 24(16.51,7.62) 25(13.97,7.62) 26(11.43,7.62) 27(8.89,7.62) 28(6.35,7.62) 29(3.81,7.62) 30(1.27,7.62) 31(-1.27,7.62) 32(-3.81,7.62) 33(-6.35,7.62) 34(-8.89,7.62) 35(-11.43,7.62) 36(-13.97,7.62) 37(-16.51,7.62) 38(-19.05,7.62) 39(-21.59,7.62) 40(-24.13,7.62)
  silkscreen extent -26.5,-6.45 26.5,6.45
PIN1 [mil] "Connector; Plug"
  rect 38x38 hole 23.62: 1(0,0)
  silkscreen extent -30,-30 30,30
PS2-6PIN [mm] "PS2 Socket, 6 Pin, Through Hole"
  round 1.6 hole 0.9: 1(-1.25,-8.5) 2(1.25,-8.5) 3(-3.25,-8.5) 4(3.25,-8.5) 5(-3.25,-11) 6(3.25,-11)
  round 3.5 hole 2.3: S(0,-4.75)
  silkscreen extent -7,-12.75 7,0
RAD-0.3 [mm] "Radial Cap, Thru-Hole; 2 Leads; 0.3 in Pin Spacing"
  round 1.2 hole 0.7: 1(-3.81,0) 2(3.81,0)
  silkscreen extent -2.54,-0.64 2.54,0.64
SCART [mm]
  rect 2x2 hole 1.5: 1(0,0)
  round 2 hole 1.5: 2(1.905,-5.08) 3(3.81,0) 4(5.715,-5.08) 5(7.62,0) 6(9.525,-5.08) 7(11.43,0) 8(13.335,-5.08) 9(15.24,0) 10(17.145,-5.08) 11(19.05,0) 12(20.955,-5.08) 13(22.86,0) 14(24.765,-5.08) 15(26.67,0) 16(28.575,-5.08) 17(30.48,0) 18(32.385,-5.08) 19(34.29,0) 20(36.195,-5.08) 21(38.1,0)
  silkscreen extent -3.81,-8.89 41.91,3.81
ST-3150-5N [mm] "Connector; Stereo Jack, 3.5mm, 5 Position"
  oval 2.7x1.8 all layers, no hole: 1(-0.85,-5.2) 2(1.15,-7.65) 3(-0.85,-11.35) 4(1.15,-13.25) 5(-0.85,-17)
  round 1.2 hole 1: 1A(-1.3,-5.2) 1B(-0.4,-5.2) 2A(0.7,-7.65) 2B(1.6,-7.65) 3A(-1.3,-11.35) 3B(-0.4,-11.35) 4A(0.7,-13.25) 4B(1.6,-13.25) 5A(-1.3,-17) 5B(-0.4,-17)
  silkscreen extent -4.9,-18 3.2,0

## Part data
B G R RESET_BTN2 RST S SND V: library part Socket, "Socket", LatestRevisionDate=17-Jul-2002, LatestRevisionNote="Re-released for DXP Platform.", Publisher="Altium Limited"
C1: "Polarized Capacitor (Radial)", LatestRevisionDate=17-Jul-2002, LatestRevisionNote="Re-released for DXP Platform.", PackageDescription="Polarized Capacitor (Radial); 2 Leads", PackageReference=RB7.6-15, Published=8-Jun-2000, Publisher="Altium Limited"
C2 C3 C4 C5 C6 C7 C8 C9 C13 C14 C15 C16 C17 C18 C19 C20 C21 C22 C25 C26 C27 C28 C29 C30 C31 C32 C33 C34 C35 C36 C37 C38 C39 C40 C41 C42 C43 C44 C47 C48 C51 C52 C54 C55 C56 C57 C58 C59 C60 C61 C62: "Capacitor", LatestRevisionDate=17-Jul-2002, LatestRevisionNote="Re-released for DXP Platform.", PackageDescription="Radial Cap, Thru-Hole; 2 Leads; 0.3 in Pin Spacing", PackageReference=RAD-0.3, Published=8-Jun-2000, Publisher="Altium Limited"
C10 C11 C12 C23 C24 C45 C46 C49 C50 C53: library part Cap, "Capacitor", LatestRevisionDate=17-Jul-2002, LatestRevisionNote="Re-released for DXP Platform.", PackageDescription="Radial Cap, Thru-Hole; 2 Leads; 0.3 in Pin Spacing", PackageReference=RAD-0.3, Published=8-Jun-2000, Publisher="Altium Limited"
D1 D4 D5 D6 D8 D10 D11 D12 D13 D14 D15 D16 D17: "High Conductance Fast Diode", Code_JEDEC=DO-204-AH, ComponentLink1Description="Manufacturer Link", ComponentLink1URL=http://www.fairchildsemi.com/, ComponentLink2Description=Datasheet, ComponentLink2URL=http://www.fairchildsemi.com/ds/1N%2F1N4148.pdf, DatasheetVersion=1997, LatestRevisionDate=17-Jul-2002, LatestRevisionNote="Re-released for DXP Platform.", PackageDescription="Diode, Axial; Body 3.8 x 1.9 mm (LxDia. max), Lead Dia. 0.53 mm (max)", PackageReference=DO-35, Published=8-Jun-2000, Publisher="Altium Limited"
D2 D3: library part "Diode 1N4149", "Computer Diode", Code_JEDEC=DO-204-AH, ComponentLink1Description="Manufacturer Link", ComponentLink1URL=http://www.national.com/, DatasheetVersion=1989, LatestRevisionDate=17-Jul-2002, LatestRevisionNote="Re-released for DXP Platform.", PackageDescription="Diode, Axial; Body 4.6 x 1.9 mm (LxDia. max), Lead Dia. 0.53 mm (max)", PackageReference=DO-35A, PackageVersion=1989, Published=8-Jun-2000, Publisher="Altium Limited"
D7 D9: library part "Diode 1N4148", "High Conductance Fast Diode", Code_JEDEC=DO-204-AH, ComponentLink1Description="Manufacturer Link", ComponentLink1URL=http://www.fairchildsemi.com/, ComponentLink2Description=Datasheet, ComponentLink2URL=http://www.fairchildsemi.com/ds/1N%2F1N4148.pdf, DatasheetVersion=1997, LatestRevisionDate=17-Jul-2002, LatestRevisionNote="Re-released for DXP Platform.", PackageDescription="Diode, Axial; Body 3.8 x 1.9 mm (LxDia. max), Lead Dia. 0.53 mm (max)", PackageReference=DO-35, Published=8-Jun-2000, Publisher="Altium Limited"
P1: "Header, 8-Pin, Dual row", LatestRevisionDate=17-Jul-2002, LatestRevisionNote="Re-released for DXP Platform.", Publisher="Altium Limited"
Q1 Q2 Q3 Q4 Q5: "NPN General Purpose Amplifier", ComponentLink1Description="Manufacturer Link", ComponentLink1URL=http://www.fairchildsemi.com/, ComponentLink2Description=Datasheet, ComponentLink2URL=http://www.fairchildsemi.com/ds/2N%2F2N3904.pdf, DatasheetVersion=1997, LatestRevisionDate=15-Jan-2003, LatestRevisionNote="PCB Footprint 'BCY-W3/D4.7' replaced", PackageDescription="TO, Flat Index; 3 In-Line, Axial Leads; Body Dia. 4.5mm; Leads 0.51 x 0.48 mm (max)", PackageReference=TO-92A, PackageVersion=Sep-1998, Published=8-Jun-2000, Publisher="Altium Limited"
R1 R2 R3 R4 R5 R6 R7 R8 R9 R10 R11 R12 R13 R14 R15 R16 R17 R18 R19 R20 R21 R22 R23 R24 R25 R26 R31 R32 R34 R35 R37 R39 R41 R43 R45 R46 R47 R48 R49 R50 R51 R52 R56 R62 R63: library part Res2, "Resistor", LatestRevisionDate=17-Jul-2002, LatestRevisionNote="Re-released for DXP Platform.", PackageDescription="Axial Device, Thru-Hole; 2 Leads; 0.4 in Pin Spacing", PackageReference=AXIAL-0.4, Published=8-Jun-2000, Publisher="Altium Limited"
R27 R28 R29 R30 R33 R36 R38 R40 R42 R44 R53 R54 R55 R57 R58 R59 R60 R61: "Resistor", LatestRevisionDate=17-Jul-2002, LatestRevisionNote="Re-released for DXP Platform.", PackageDescription="Axial Device, Thru-Hole; 2 Leads; 0.4 in Pin Spacing", PackageReference=AXIAL-0.4, Published=8-Jun-2000, Publisher="Altium Limited"
U1 U34: library part SN74HC04N, "Hex Inverter", ComponentLink1Description="Manufacturer Link", ComponentLink1URL=http://www.ti.com/, ComponentLink2Description=Datasheet, ComponentLink2URL=http://www-s.ti.com/sc/ds/sn74hc04.pdf, DatasheetVersion=May-1997, LatestRevisionDate=04-Mar-2005, LatestRevisionNote="Stylized 3D Model Added.", PackageDescription="DIP; 14 Leads; Row Spacing 7.62 mm; Pitch 2.54 mm", PackageReference=N014, PackageVersion=Oct-1995, Published=8-Jun-2000, Publisher="Altium Limited"
U2 U8 U9: library part SN74HC74N, "Dual D-Type Positive-Edge-Triggered Flip-Flop with Clear and Preset", ComponentLink1Description="Manufacturer Link", ComponentLink1URL=http://www.ti.com/, ComponentLink2Description=Datasheet, ComponentLink2URL=http://www-s.ti.com/sc/ds/sn74hc74.pdf, DatasheetVersion=May-1997, LatestRevisionDate=04-Mar-2005, LatestRevisionNote="Stylized 3D Model Added.", PackageDescription="DIP; 14 Leads; Row Spacing 7.62 mm; Pitch 2.54 mm", PackageReference=N014, PackageVersion=Oct-1995, Published=8-Jun-2000, Publisher="Altium Limited"
U3 U4 U5 U6: library part SN74HC193N, "4-Bit Synchronous Up/Down Counter (Dual Clock with Clear)", Code_JEDEC=MS-001-BB, ComponentLink1Description="Manufacturer Link", ComponentLink1URL=http://www.ti.com/, ComponentLink2Description=Datasheet, ComponentLink2URL=http://www-s.ti.com/sc/ds/sn74hc193.pdf, DatasheetVersion=May-1997, LatestRevisionDate=04-Mar-2005, LatestRevisionNote="Stylized 3D Model Added.", PackageDescription="DIP; 16 Leads; Row Spacing 7.62 mm; Pitch 2.54 mm", PackageReference=N016, PackageVersion=Oct-1995, Published=8-Jun-2000, Publisher="Altium Limited"
U7: library part MC14520BCP, "Dual Binary Up Counter", Code_JEDEC=MS-001-BB, ComponentLink1Description="Manufacturer Link", ComponentLink1URL=http://www.onsemi.com/, ComponentLink2Description=Datasheet, ComponentLink2URL=http://www.onsemi.com/pub/Collateral/MC14518B-D.PDF, DatasheetVersion=1995, PackageDescription="DIP; 16 Leads; Row Spacing 7.62 mm; Pitch 2.54 mm", PackageReference=648-08, PackageVersion=Apr-2000, Published=15-Apr-2002, Publisher="Altium Limited"
U10: library part SN74HC02N, "Quadruple 2-Input Positive-NOR Gate", ComponentLink1Description="Manufacturer Link", ComponentLink1URL=http://www.ti.com/, ComponentLink2Description=Datasheet, ComponentLink2URL=http://www-s.ti.com/sc/ds/sn74hc02.pdf, DatasheetVersion=May-1997, LatestRevisionDate=04-Mar-2005, LatestRevisionNote="Stylized 3D Model Added.", PackageDescription="DIP; 14 Leads; Row Spacing 7.62 mm; Pitch 2.54 mm", PackageReference=N014, PackageVersion=Oct-1995, Published=8-Jun-2000, Publisher="Altium Limited"
U11: library part SN74HC86N, "Quadruple 2-Input Exclusive-OR Gate", ComponentLink1Description="Manufacturer Link", ComponentLink1URL=http://www.ti.com/, ComponentLink2Description=Datasheet, ComponentLink2URL=http://www-s.ti.com/sc/ds/SN54HC86.pdf, DatasheetVersion=Aug-1999, LatestRevisionDate=04-Mar-2005, LatestRevisionNote="Stylized 3D Model Added.", PackageDescription="DIP; 14 Leads; Row Spacing 7.62 mm; Pitch 2.54 mm", PackageReference=N014, PackageVersion=Oct-1995, Published=8-Jun-2000, Publisher="Altium Limited"
U12: library part SN74HC00N, "Quadruple 2-Input Positive-NAND Gate", ComponentLink1Description="Manufacturer Link", ComponentLink1URL=http://www.ti.com/, ComponentLink2Description=Datasheet, ComponentLink2URL=http://www-s.ti.com/sc/ds/sn74hc00.pdf, DatasheetVersion=May-1997, LatestRevisionDate=04-Mar-2005, LatestRevisionNote="Stylized 3D Model Added.", PackageDescription="DIP; 14 Leads; Row Spacing 7.62 mm; Pitch 2.54 mm", PackageReference=N014, PackageVersion=Oct-1995, Published=8-Jun-2000, Publisher="Altium Limited"
U13: library part SN74HC08N, "Quadruple 2-Input Positive-AND Gate", ComponentLink1Description="Manufacturer Link", ComponentLink1URL=http://www.ti.com/, ComponentLink2Description=Datasheet, ComponentLink2URL=http://www-s.ti.com/sc/ds/SN74HC08.pdf, DatasheetVersion=May-1997, LatestRevisionDate=04-Mar-2005, LatestRevisionNote="Stylized 3D Model Added.", PackageDescription="DIP; 14 Leads; Row Spacing 7.62 mm; Pitch 2.54 mm", PackageReference=N014, PackageVersion=Oct-1995, Published=8-Jun-2000, Publisher="Altium Limited"
U14: library part SN74HC32N, "Quadruple 2-Input Positive-OR Gate", ComponentLink1Description="Manufacturer Link", ComponentLink1URL=http://www.ti.com/, ComponentLink2Description=Datasheet, ComponentLink2URL=http://www-s.ti.com/sc/ds/sn74hc32.pdf, DatasheetVersion=May-1997, LatestRevisionDate=04-Mar-2005, LatestRevisionNote="Stylized 3D Model Added.", PackageDescription="DIP; 14 Leads; Row Spacing 7.62 mm; Pitch 2.54 mm", PackageReference=N014, PackageVersion=Oct-1995, Published=8-Jun-2000, Publisher="Altium Limited"
U15 U16 U17 U18 U19 U36 U37 U38: library part SN74HC257N, "Quadruple 2-Line to 1-Line Data Selector/Multiplexer with 3-State Outputs", Code_JEDEC=MS-001-BB, ComponentLink1Description="Manufacturer Link", ComponentLink1URL=http://www.ti.com/, ComponentLink2Description=Datasheet, ComponentLink2URL=http://www-s.ti.com/sc/ds/sn74hc257.pdf, DatasheetVersion=Jun-1989, LatestRevisionDate=04-Mar-2005, LatestRevisionNote="Stylized 3D Model Added.", PackageDescription="DIP; 16 Leads; Row Spacing 7.62 mm; Pitch 2.54 mm", PackageReference=N016, PackageVersion=Oct-1995, Published=8-Jun-2000, Publisher="Altium Limited"
U20: "CMOS 8-Bit Microprocessor", ComponentLink1Description="Manufacturer Link", ComponentLink1URL=http://www.zilog.com/, DatasheetVersion=Jan-1989, LatestRevisionDate=04-Mar-2005, LatestRevisionNote="Stylized 3D Model Added.", PackageDescription="DIP; 40 Leads; Row Spacing 15.24 mm; Pitch 2.54 mm", PackageReference=PDIP40, PackageVersion=Jun-1999, Published=15-Apr-2002, Publisher="Altium Limited"
U29: "512 Kbit (64Kb x 8) UV EPROM and OTP EPROM", ComponentLink1Description="Manufacturer Link", ComponentLink1URL=http://www.st.com/, ComponentLink2Description=Datasheet, ComponentLink2URL=http://www.st.com/stonline/products/literature/ds/2387/m27c512.pdf, DatasheetVersion=Nov-1998, LatestRevisionDate=06-Jun-2005, LatestRevisionNote="Stylized 3D Model Added.", PackageDescription="DIP; 28 Leads; Row Spacing 15.24 mm; Pitch 2.54 mm", PackageReference=PDIP28, PackageVersion=Jan-2003, Published=24-Aug-2001, Publisher="Altium Limited"
U30 U31: library part SN74HC298N, "Quadruple 2-Input Multiplexer with Storage", Code_JEDEC=MS-001-BB, ComponentLink1Description="Manufacturer Link", ComponentLink1URL=http://www.ti.com/, DatasheetVersion=Jun-1989, LatestRevisionDate=04-Mar-2005, LatestRevisionNote="Stylized 3D Model Added.", PackageDescription="DIP; 16 Leads; Row Spacing 7.62 mm; Pitch 2.54 mm", PackageReference=N016D, PackageVersion=Oct-1995, Published=8-Jun-2000, Publisher="Altium Limited"
U32: library part SN74HC373N, "Octal Transparent D-Type Latches with 3-State Outputs", ComponentLink1Description="Manufacturer Link", ComponentLink1URL=http://www.ti.com/, ComponentLink2Description=Datasheet, ComponentLink2URL=http://www-s.ti.com/sc/ds/sn54hc373.pdf, DatasheetVersion=May-1997, LatestRevisionDate=04-Mar-2005, LatestRevisionNote="Stylized 3D Model Added.", PackageDescription="DIP; 20 Leads; Row Spacing 7.62 mm; Pitch 2.54 mm", PackageReference=N020, PackageVersion=Oct-1995, Published=8-Jun-2000, Publisher="Altium Limited"
U33: library part SN74HC165N, "8-Bit Parallel-Load Shift Register", Code_JEDEC=MS-001-BB, ComponentLink1Description="Manufacturer Link", ComponentLink1URL=http://www.ti.com/, ComponentLink2Description=Datasheet, ComponentLink2URL=http://www-s.ti.com/sc/ds/sn74hc165.pdf, DatasheetVersion=May-1997, LatestRevisionDate=04-Mar-2005, LatestRevisionNote="Stylized 3D Model Added.", PackageDescription="DIP; 16 Leads; Row Spacing 7.62 mm; Pitch 2.54 mm", PackageReference=N016, PackageVersion=Oct-1995, Published=8-Jun-2000, Publisher="Altium Limited"
U35: library part SN74LS95BN, "4-Bit Parallel-Access Shift Register", ComponentAvailability=Obsolete, ComponentLink1Description="Manufacturer Link", ComponentLink1URL=http://www.ti.com/, ComponentLink2Description=Datasheet, ComponentLink2URL=http://www-s.ti.com/sc/ds/sn5495a.pdf, DatasheetVersion=Mar-1988, LatestRevisionDate=04-Mar-2005, LatestRevisionNote="Stylized 3D Model Added.", PackageDescription="DIP; 14 Leads; Row Spacing 7.62 mm; Pitch 2.54 mm", PackageReference=N014, PackageVersion=Oct-1995, Published=8-Jun-2000, Publisher="Altium Limited"
U39: library part SN74HC174N, "Hex D-Type Flip-Flop with Clear", Code_JEDEC=MS-001-BB, ComponentLink1Description="Manufacturer Link", ComponentLink1URL=http://www.ti.com/, ComponentLink2Description=Datasheet, ComponentLink2URL=http://www-s.ti.com/sc/ds/sn74hc174.pdf, DatasheetVersion=May-1997, LatestRevisionDate=04-Mar-2005, LatestRevisionNote="Stylized 3D Model Added.", PackageDescription="DIP; 16 Leads; Row Spacing 7.62 mm; Pitch 2.54 mm", PackageReference=N016, PackageVersion=Oct-1995, Published=8-Jun-2000, Publisher="Altium Limited"
U40: library part SN74HC10N, "Triple 3-Input Positive-NAND Gate", ComponentLink1Description="Manufacturer Link", ComponentLink1URL=http://www.ti.com/, ComponentLink2Description=Datasheet, ComponentLink2URL=http://www-s.ti.com/sc/ds/sn74hc10.pdf, DatasheetVersion=May-1997, LatestRevisionDate=04-Mar-2005, LatestRevisionNote="Stylized 3D Model Added.", PackageDescription="DIP; 14 Leads; Row Spacing 7.62 mm; Pitch 2.54 mm", PackageReference=N014, PackageVersion=Oct-1995, Published=8-Jun-2000, Publisher="Altium Limited"
U41: "Dual D-Type Positive-Edge-Triggered Flip-Flop with Clear and Preset", ComponentLink1Description="Manufacturer Link", ComponentLink1URL=http://www.ti.com/, ComponentLink2Description=Datasheet, ComponentLink2URL=http://www-s.ti.com/sc/ds/sn74hc74.pdf, DatasheetVersion=May-1997, LatestRevisionDate=04-Mar-2005, LatestRevisionNote="Stylized 3D Model Added.", PackageDescription="DIP; 14 Leads; Row Spacing 7.62 mm; Pitch 2.54 mm", PackageReference=N014, PackageVersion=Oct-1995, Published=8-Jun-2000, Publisher="Altium Limited"
U42: "Differential Comparator with Strobe", ComponentLink1Description="Manufacturer Link", ComponentLink1URL=http://www.ti.com/, ComponentLink2Description=Datasheet, ComponentLink2URL=http://www-s.ti.com/sc/ds/lm111.pdf, DatasheetVersion=Feb-1992, LatestRevisionDate=20-Jul-2007, LatestRevisionNote="Sch Symbol changed.", Note="Pins 1, 5, 10, 12, 13 and 14 are NC pins.", PackageDescription="DIP; 14 Leads; Row Spacing 7.62 mm; Pitch 2.54 mm", PackageReference=J014, PackageVersion=Jun-1999, Published=16-Jan-2001, Publisher="Altium Limited"
U43: "8-bit AVR Microcontroller, 16KB Flash, 512 Bytes EEPROM, 1KB SRAM, 28-pin PDIP, Industrial Grade (-40°C to 85°C)", Supplier Part Number 1=ATMEGA168A-PU-ND, ComponentLink1Description="Manufacturer Link", ComponentLink1URL=http://www.atmel.com/products/avr/default.asp?, ComponentLink2Description="ATmega48A/48PA/88A/88PA/168A/168PA/328/328P Datasheet", ComponentLink2URL=http://www.atmel.com/dyn/resources/prod_documents/8271.pdf, ComponentLink3Description="ATmega48A/48PA/88A/88PA/168A/168PA/328/328P Summary", ComponentLink3URL=http://www.atmel.com/dyn/resources/prod_documents/8271S.pdf, ComponentLink4Description="Atmel.com Home", ComponentLink4URL=http://www.atmel.com, DatasheetVersion="revA, Jan-2010", PackageDescription="28-lead (0.300\"/7.62mm Wide) Plastic Dual Inline Package (PDIP)", PackageReference=28P3, PackageVersion="revB, Sep-2001", Published=1-Apr-2010, Publisher="Altium Limited", Supplier 1=Digi-Key, Supplier 2=Mouser, Supplier Part Number 2=556-ATMEGA168A-PU
U44: library part SN74HC138N, "3-Line to 8-Line Decoder / Demultiplexer", Code_JEDEC=MS-001-BB, ComponentLink1Description="Manufacturer Link", ComponentLink1URL=http://www.ti.com/, ComponentLink2Description=Datasheet, ComponentLink2URL=http://www-s.ti.com/sc/ds/sn74hc138.pdf, DatasheetVersion=May-1997, LatestRevisionDate=04-Mar-2005, LatestRevisionNote="Stylized 3D Model Added.", PackageDescription="DIP; 16 Leads; Row Spacing 7.62 mm; Pitch 2.54 mm", PackageReference=N016, PackageVersion=Oct-1995, Published=8-Jun-2000, Publisher="Altium Limited"
U45: "Hex D-Type Flip-Flop with Clear", Code_JEDEC=MS-001-BB, ComponentLink1Description="Manufacturer Link", ComponentLink1URL=http://www.ti.com/, ComponentLink2Description=Datasheet, ComponentLink2URL=http://www-s.ti.com/sc/ds/sn74hc174.pdf, DatasheetVersion=May-1997, LatestRevisionDate=04-Mar-2005, LatestRevisionNote="Stylized 3D Model Added.", PackageDescription="DIP; 16 Leads; Row Spacing 7.62 mm; Pitch 2.54 mm", PackageReference=N016, PackageVersion=Oct-1995, Published=8-Jun-2000, Publisher="Altium Limited"
U46: "Quadruple 2-Line to 1-Line Data Selector/Multiplexer with 3-State Outputs", Code_JEDEC=MS-001-BB, ComponentLink1Description="Manufacturer Link", ComponentLink1URL=http://www.ti.com/, ComponentLink2Description=Datasheet, ComponentLink2URL=http://www-s.ti.com/sc/ds/sn74hc257.pdf, DatasheetVersion=Jun-1989, LatestRevisionDate=04-Mar-2005, LatestRevisionNote="Stylized 3D Model Added.", PackageDescription="DIP; 16 Leads; Row Spacing 7.62 mm; Pitch 2.54 mm", PackageReference=N016, PackageVersion=Oct-1995, Published=8-Jun-2000, Publisher="Altium Limited"
U47 U53: "Quadruple 2-Input Positive-NOR Gate", ComponentLink1Description="Manufacturer Link", ComponentLink1URL=http://www.ti.com/, ComponentLink2Description=Datasheet, ComponentLink2URL=http://www-s.ti.com/sc/ds/sn74hc02.pdf, DatasheetVersion=May-1997, LatestRevisionDate=04-Mar-2005, LatestRevisionNote="Stylized 3D Model Added.", PackageDescription="DIP; 14 Leads; Row Spacing 7.62 mm; Pitch 2.54 mm", PackageReference=N014, PackageVersion=Oct-1995, Published=8-Jun-2000, Publisher="Altium Limited"
U48: "Quadruple 2-Input Positive-NAND Gate", ComponentLink1Description="Manufacturer Link", ComponentLink1URL=http://www.ti.com/, ComponentLink2Description=Datasheet, ComponentLink2URL=http://www-s.ti.com/sc/ds/sn74hc00.pdf, DatasheetVersion=May-1997, LatestRevisionDate=04-Mar-2005, LatestRevisionNote="Stylized 3D Model Added.", PackageDescription="DIP; 14 Leads; Row Spacing 7.62 mm; Pitch 2.54 mm", PackageReference=N014, PackageVersion=Oct-1995, Published=8-Jun-2000, Publisher="Altium Limited"
U49 U51: "Quadruple 2-Input Positive-OR Gate", ComponentLink1Description="Manufacturer Link", ComponentLink1URL=http://www.ti.com/, ComponentLink2Description=Datasheet, ComponentLink2URL=http://www-s.ti.com/sc/ds/sn74hc32.pdf, DatasheetVersion=May-1997, LatestRevisionDate=04-Mar-2005, LatestRevisionNote="Stylized 3D Model Added.", PackageDescription="DIP; 14 Leads; Row Spacing 7.62 mm; Pitch 2.54 mm", PackageReference=N014, PackageVersion=Oct-1995, Published=8-Jun-2000, Publisher="Altium Limited"
U50: "Quadruple 2-Input Positive-AND Gate", ComponentLink1Description="Manufacturer Link", ComponentLink1URL=http://www.ti.com/, ComponentLink2Description=Datasheet, ComponentLink2URL=http://www-s.ti.com/sc/ds/SN74HC08.pdf, DatasheetVersion=May-1997, LatestRevisionDate=04-Mar-2005, LatestRevisionNote="Stylized 3D Model Added.", PackageDescription="DIP; 14 Leads; Row Spacing 7.62 mm; Pitch 2.54 mm", PackageReference=N014, PackageVersion=Oct-1995, Published=8-Jun-2000, Publisher="Altium Limited"
X1: "Low Voltage Power Supply Connector", ComponentLink1Description="Manufacturer Link", ComponentLink1URL=http://domino.kycon.com/internet/Products.html, DatasheetDocument=09-May-2002, Published=17-Dec-2003, Publisher="Altium Limited"
X2: "6 Pin Through Hole PS2 Socket (Kycon P/N)", ComponentLink1Description="Manufacturer Link", ComponentLink1URL=http://www.oupiin.com/prodindx.html#Headers, Published=17-Dec-2003, Publisher="Altium Limited"
X3: "USB 1.1, Right Angle, Thru-Hole, A Type, Receptacle, 4 Position, Black", PackageDocument=11-Jan-2004, ComponentLink1Description="Manufacturer Link", ComponentLink1URL=http://www.tycoelectronics.com/, ComponentLink2Description="Packaging Specification", ComponentLink2URL=http://ecommas.tycoelectronics.com/commerce/DocumentDelivery/DDEController?Action=showdoc&DocId=Customer+Drawing%7F787761%7FH%7Ftif%7FEnglish%7FENG_CD_787761_H.tif, ContactMaterial="Copper Alloy", ContactPlating="Gold Flash over Palladium Nickel or Gold (30) over Nickel", DatasheetDocument=11-Jan-2004, DrillSize="Corresponds to nominal value.", HousingMaterial=Thermoplastic, PackageReference=787761, PanelGround=Without, PCB_Layout="Complies with manufacturer's recommendation.", Published=15-Jul-2004, Publisher="Altium Limited", TerminationLength="2.84mm [0.112in.]"
X4 X5 X6: library part "Phonejack Stereo SW", "3-Conductor Jack with 2 break contacts (normals) and 2 auxiliary make contacts", ComponentLink1Description="Manufacturer Link", ComponentLink1URL=http://domino.kycon.com/internet/Products.html, DatasheetDocument=07-Mar-2000, LatestRevisionDate=17-Dec-2003, LatestRevisionNote="PCB Footprint replaced.", Published=5-Jan-2004, Publisher="Altium Limited"
X7: "Header, 5-Pin", LatestRevisionDate=17-Jul-2002, LatestRevisionNote="Re-released for DXP Platform.", Publisher="Altium Limited"
Y1: "Crystal Oscillator", LatestRevisionDate=17-Jul-2002, LatestRevisionNote="Re-released for DXP Platform.", PackageDescription="Crystal, Thru-Hole; 2 Leads; Body 3.1 x 8.2 mm (Dia.xH)", PackageReference=R38, Published=8-Jun-2000, Publisher="Altium Limited"
Y2: library part XTAL, "Crystal Oscillator", LatestRevisionDate=17-Jul-2002, LatestRevisionNote="Re-released for DXP Platform.", PackageDescription="Crystal, Thru-Hole; 2 Leads; Body 3.1 x 8.2 mm (Dia.xH)", PackageReference=R38, Published=8-Jun-2000, Publisher="Altium Limited"
BTN1 BTN2: LatestRevisionDate=17-Jul-2002, LatestRevisionNote="Re-released for DXP Platform.", Publisher="Altium Limited"

## Via types
v1: diameter 39.37, hole 19.68, Top Layer to Bottom Layer, tented both sides, 472 vias

## Nets (pads, with @x,y where several pads share a name; then routed paths per layer and width w, separated by ;. In a path a pad name is that pad's centre, name@x,y a point inside that pad or via, vN(x,y) a via of type N, cw(c..) or ccw(c..) an arc to the next point about the centre after c; other vN are vias at no path point)
A0: U15.2 U20.30 U29.10 U37.1 U38.1 U49.1 U50.4 | length 12028.1
  Top Layer w20: U37.1@2200,2110 2247.53,2062.47 3352.47,2062.47 U38.1@3400,2110 ; v1(2550,6060) U29.10@2650,6060 2950,6060 3000,6010 4350,6010 4400,5960 U20.30@4600,5960 v1(5500,5960) 5800,5960 v1(5850,5910) ; v1(5500,6510) v1(6950,6510)
  Bottom Layer w20: v1(2550,2060) v1(2550,6060) ; v1(5500,5960) v1(5500,6510) 5500,6860 U50.4@5550,6910 ; U49.1@5850,5104.09 v1(5850,5910) ; U15.2@6950,6310 v1(6950,6510)
A1: U15.5 U20.31 U29.9 U47.2 U53.2 | length 7468.4
  Top Layer w20: U53.2@2100,3910 2150,3960 v1(2450,3960) ; U47.2@2100,5110 2150,5160 v1(2450,5160) ; v1(2450,6160) U29.9@2650,6160 2950,6160 3000,6110 4350,6110 4400,6060 U20.31@4600,6060 v1(6190,6060) ; v1(6190,6300) 6250,6360 6600,6360 U15.5@6650,6310
  Bottom Layer w20: v1(2450,3960) v1(2450,5160) v1(2450,6160) ; v1(6190,6060) v1(6190,6300)
A2: U15.11 U20.32 U29.8 | length 4045
  Top Layer w20: U29.8@2650,6260 2950,6260 3000,6210 4350,6210 4400,6160 U20.32@4600,6160 6180,6160 6230,6210 v1(6350,6210)
  Bottom Layer w20: v1(6350,6210) U15.11@6550,6010
A3: U15.14 U20.33 U29.7 | length 4403.6
  Top Layer w20: U29.7@2650,6360 2950,6360 3000,6310 4350,6310 4400,6260 U20.33@4600,6260 v1(6700,6260)
  Bottom Layer w20: v1(6700,6260) 6850,6110 U15.14@6850,6010
A4: U16.2 U20.34 U29.6 | length 5009.4
  Top Layer w20: U29.6@2650,6460 2950,6460 3000,6410 4350,6410 4400,6360 U20.34@4600,6360 ; v1(4650,7010) 5200,7010 5250,6960 6910,6960 6950,6920 U16.2@6950,6910
  Bottom Layer w20: U20.34@4600,6360 4650,6410 v1(4650,7010)
A5: U16.5 U20.35 U29.5 U50.5 | length 4474.3
  Top Layer w20: U29.5@2650,6560 2950,6560 3000,6510 4340,6510 4390,6460 U20.35@4600,6460 v1(5350,6460) ; U50.5@5450,6910 5500,6860 6600,6860 U16.5@6650,6910
  Bottom Layer w20: v1(5350,6460) 5397.53,6507.53 5397.53,6857.53 U50.5@5450,6910
A6: U16.11 U20.36 U29.4 | length 3962.1
  Top Layer w20: U29.4@2650,6660 2950,6660 3000,6610 4350,6610 4400,6560 U20.36@4600,6560 6500,6560 U16.11@6550,6610
A7: U16.14 U20.37 U29.3 | length 4732.8
  Top Layer w20: v1(2750,6960) 2800,7010 v1(4450,7010) ; v1(4450,6660) U20.37@4600,6660 6800,6660 U16.14@6850,6610
  Bottom Layer w20: U29.3@2650,6760 2750,6860 v1(2750,6960) ; v1(4450,6660) v1(4450,7010)
A8: D10.2 U15.3 U20.38 U29.25 | length 11160.9
  Top Layer w20: v1(400,6710) 2950,6710 3000,6660 U29.25@3250,6660 3480,6660 3530,6710 4350,6710 4400,6760 U20.38@4600,6760 ; v1(4550,6410) 4552.47,6407.53 6752.47,6407.53 U15.3@6850,6310
  Bottom Layer w20: v1(400,6710) 400,5070 500,4970 500,3110 850,2760 D10.2@850,2709.76 ; v1(4550,6410) 4550,6710 U20.38@4600,6760
A9: D11.2 U15.6 U20.39 U29.24 U51.1 | length 12534.7
  Top Layer w20: v1(350,6610) 2950,6610 3000,6560 U29.24@3250,6560 v1(3400,6560) v1(3600,6560) ; v1(3950,6810) 4350,6810 4400,6860 U20.39@4600,6860 ; v1(4500,6510) 5400,6510 5450,6460 v1(6400,6460)
  Bottom Layer w20: v1(350,6610) 350,5010 450,4910 450,3060 750,2760 D11.2@750,2709.76 ; U51.1@3400,5110 v1(3400,6560) ; v1(3600,6560) 3600,6660 3750,6810 v1(3950,6810) ; v1(4500,6510) 4500,6830 4530,6860 U20.39@4600,6860 ; v1(6400,6460) U15.6@6550,6310
A10: D12.2 U15.10 U20.40 U29.21 | length 11419.5
  Top Layer w20: v1(300,6310) 302.47,6307.53 2952.47,6307.53 3000,6260 U29.21@3250,6260 ; v1(3350,6860) 3490,6860 3540,6910 4350,6910 4400,6960 U20.40@4600,6960 v1(5100,6960) ; v1(5100,6110) v1(6300,6110)